# EAGLE board working (EAGLE 6.3), part 1 of 2
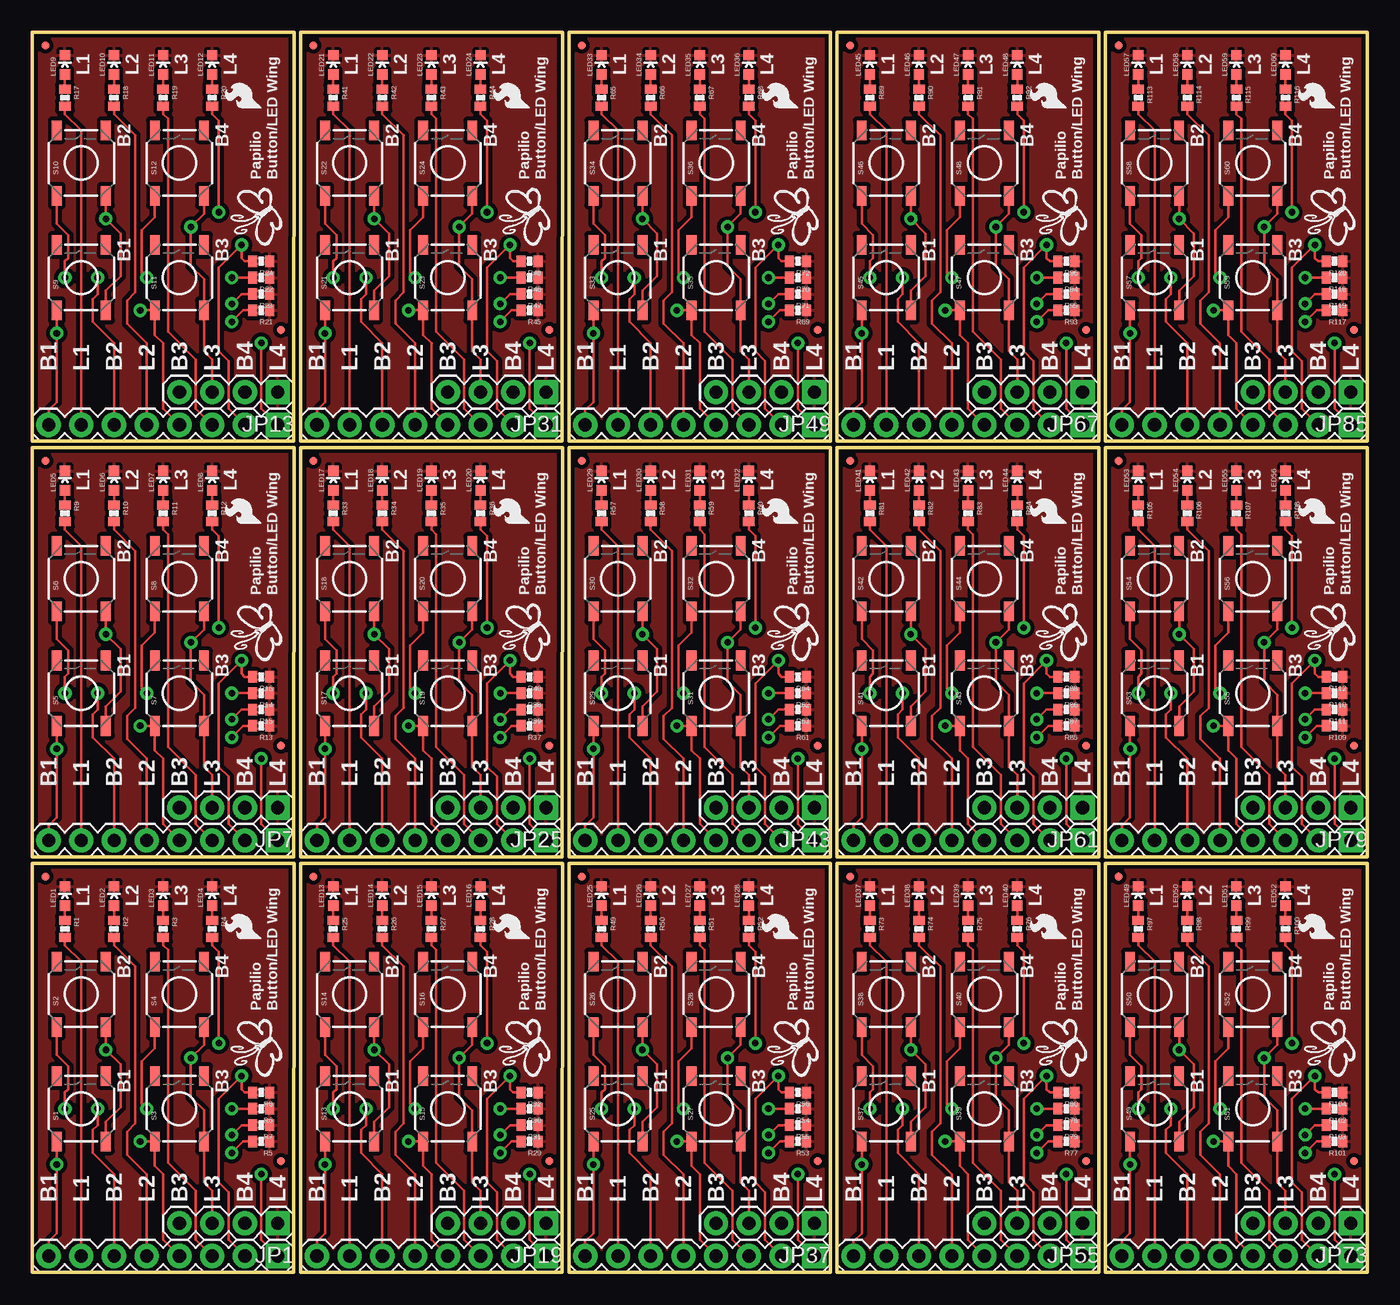
[diagram p0: board, top side]
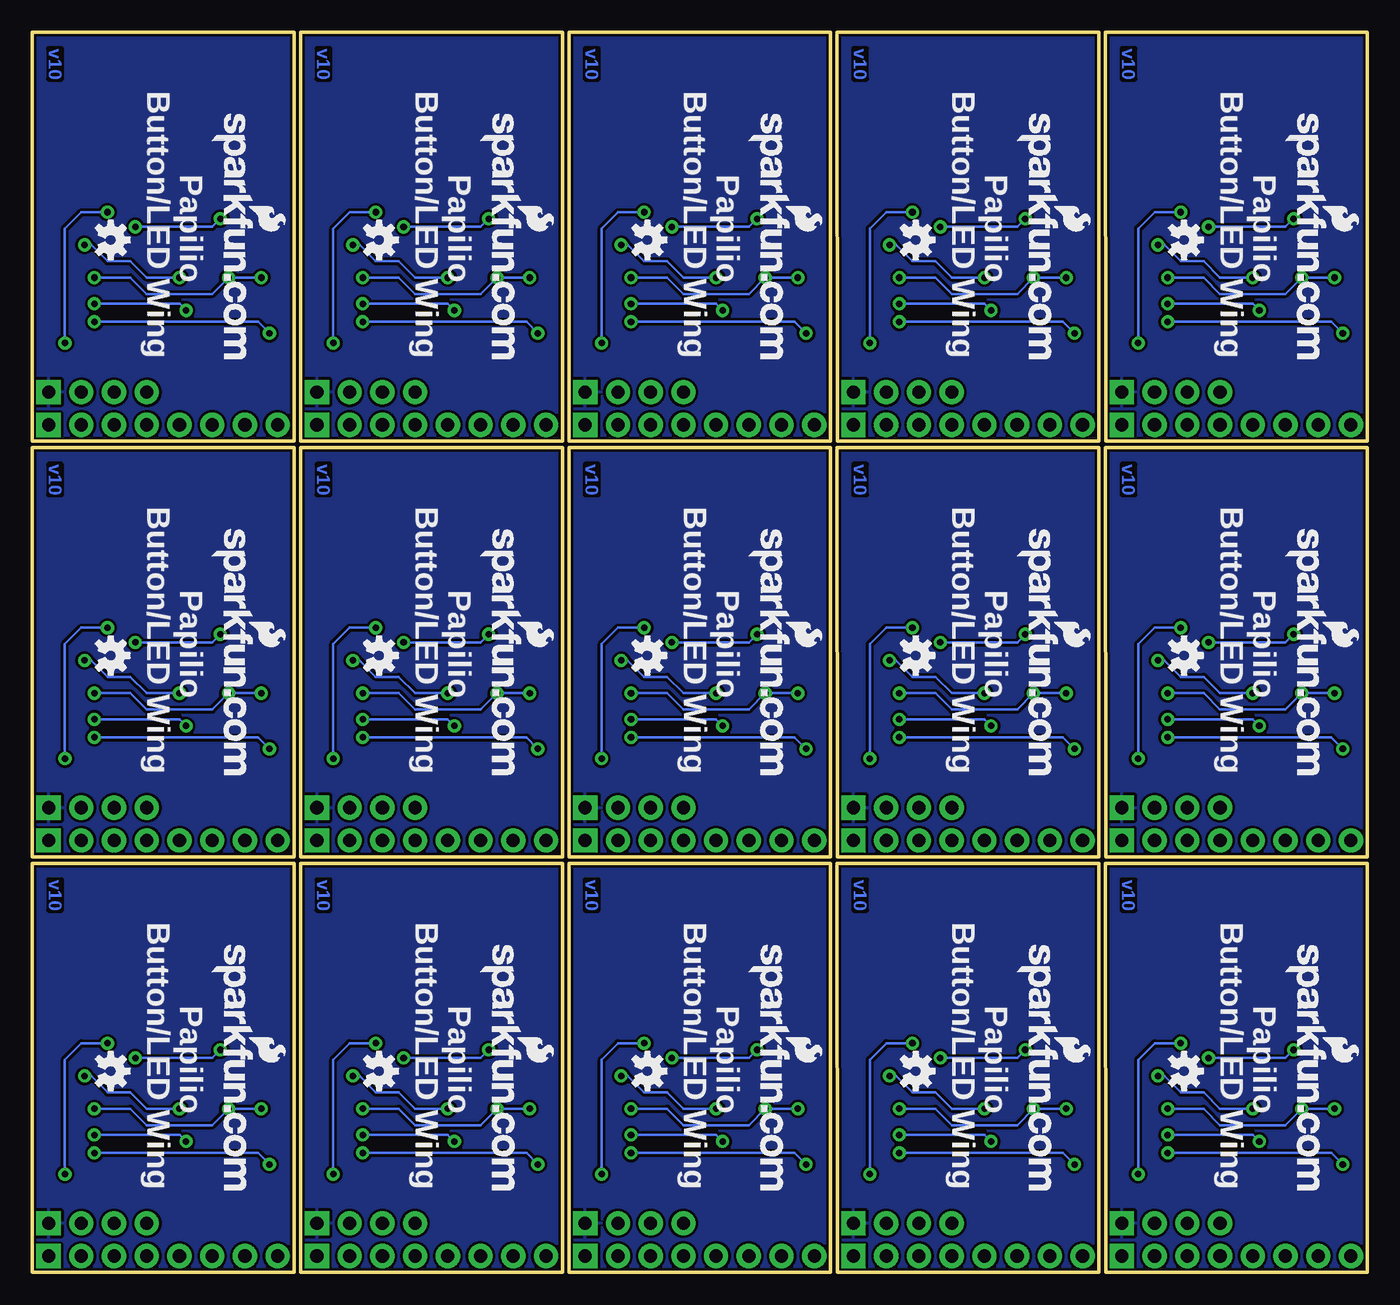
[diagram p1: board, bottom side, seen from below]

Size 103.63 x 96.27 mm. Coordinates in mm from the lower left corner, seen from the top.
Outline: 0,0 20.3,0 20.32,31.75 0,31.75 0,0
Outline: 0,32.26 20.3,32.26 20.32,64.01 0,64.01 0,32.26
Outline: 0,64.52 20.3,64.52 20.32,96.27 0,96.27 0,64.52
Outline: 20.83,0 41.13,0 41.15,31.75 20.83,31.75 20.83,0
Outline: 20.83,32.26 41.13,32.26 41.15,64.01 20.83,64.01 20.83,32.26
Outline: 20.83,64.52 41.13,64.52 41.15,96.27 20.83,96.27 20.83,64.52
Outline: 41.66,0 61.96,0 61.98,31.75 41.66,31.75 41.66,0
Outline: 41.66,32.26 61.96,32.26 61.98,64.01 41.66,64.01 41.66,32.26
Outline: 41.66,64.52 61.96,64.52 61.98,96.27 41.66,96.27 41.66,64.52
Outline: 62.48,0 82.78,0 82.8,31.75 62.48,31.75 62.48,0
Outline: 62.48,32.26 82.78,32.26 82.8,64.01 62.48,64.01 62.48,32.26
Outline: 62.48,64.52 82.78,64.52 82.8,96.27 62.48,96.27 62.48,64.52
Outline: 83.31,0 103.61,0 103.63,31.75 83.31,31.75 83.31,0
Outline: 83.31,32.26 103.61,32.26 103.63,64.01 83.31,64.01 83.31,32.26
Outline: 83.31,64.52 103.61,64.52 103.63,96.27 83.31,96.27 83.31,64.52
Copper layers (1*16): Top 0.035mm / dielectric 1.5mm / Bottom 0.035mm
Design rules "default": minimum track width 8mil, minimum drill 20mil, track to track 8mil, track to pad 8mil, pad to pad 8mil, via to via 8mil, smd to smd 8mil, copper to edge 8mil, drill to drill 8mil, minimum pad ring 12mil, minimum via ring 10mil, stop-mask expansion 4mil, vias tented up to drill 20mil, thermal gap 10mil

## Footprints (pad centres in the part's own frame; a part is rotated, then mirrored left to right if it is on the bottom)
1X04 = drill 1.016 pad 1.88 square: 1 0,0 | drill 1.016 pad 1.88: 2 2.54,0; 3 5.08,0; 4 7.62,0
1X08 = drill 1.016 pad 1.88 square: 1 0,0 | drill 1.016 pad 1.88: 2 2.54,0; 3 5.08,0; 4 7.62,0; 5 10.16,0; 6 12.7,0; 7 15.24,0; 8 17.78,0
MICRO-FIDUCIAL = smd 0.635 x 0.635: 1 0,0
LED-0603 = smd 0.8 x 0.8: A 0,-0.75; C 0,0.75
0402-RES = smd 0.7 x 0.9: 1 -0.65,0; 2 0.65,0
TACTILE_SWITCH_SMD = smd 1.524 x 0.762: 1 -2.54,1.905; 2 2.54,1.905; 3 -2.54,-1.905; 4 2.54,-1.905

## Placement (x,y rotation side)
JP1  [1X04]  19.05,3.81 180 top
JP2  [1X08]  19.05,1.27 180 top
JP3  LOGO-SFESK  [SFE-LOGO-FLAME]  17.78,25.91 90 top
JP4  LOGO-SFENEW  [SFE-NEW-WEBLOGO]  6.35,25.4 270 bottom
JP5  FIDUCIALUFIDUCIAL  [MICRO-FIDUCIAL]  1.02,30.73 0 top
JP6  FIDUCIALUFIDUCIAL  [MICRO-FIDUCIAL]  19.3,8.64 0 top
JP7  [1X04]  19.05,36.07 180 top
JP8  [1X08]  19.05,33.53 180 top
JP9  LOGO-SFESK  [SFE-LOGO-FLAME]  17.78,58.17 90 top
JP10  LOGO-SFENEW  [SFE-NEW-WEBLOGO]  6.35,57.66 270 bottom
JP11  FIDUCIALUFIDUCIAL  [MICRO-FIDUCIAL]  1.02,62.99 0 top
JP12  FIDUCIALUFIDUCIAL  [MICRO-FIDUCIAL]  19.3,40.89 0 top
JP13  [1X04]  19.05,68.33 180 top
JP14  [1X08]  19.05,65.79 180 top
JP15  LOGO-SFESK  [SFE-LOGO-FLAME]  17.78,90.42 90 top
JP16  LOGO-SFENEW  [SFE-NEW-WEBLOGO]  6.35,89.92 270 bottom
JP17  FIDUCIALUFIDUCIAL  [MICRO-FIDUCIAL]  1.02,95.25 0 top
JP18  FIDUCIALUFIDUCIAL  [MICRO-FIDUCIAL]  19.3,73.15 0 top
JP19  [1X04]  39.88,3.81 180 top
JP20  [1X08]  39.88,1.27 180 top
JP21  LOGO-SFESK  [SFE-LOGO-FLAME]  38.61,25.91 90 top
JP22  LOGO-SFENEW  [SFE-NEW-WEBLOGO]  27.18,25.4 270 bottom
JP23  FIDUCIALUFIDUCIAL  [MICRO-FIDUCIAL]  21.84,30.73 0 top
JP24  FIDUCIALUFIDUCIAL  [MICRO-FIDUCIAL]  40.13,8.64 0 top
JP25  [1X04]  39.88,36.07 180 top
JP26  [1X08]  39.88,33.53 180 top
JP27  LOGO-SFESK  [SFE-LOGO-FLAME]  38.61,58.17 90 top
JP28  LOGO-SFENEW  [SFE-NEW-WEBLOGO]  27.18,57.66 270 bottom
JP29  FIDUCIALUFIDUCIAL  [MICRO-FIDUCIAL]  21.84,62.99 0 top
JP30  FIDUCIALUFIDUCIAL  [MICRO-FIDUCIAL]  40.13,40.89 0 top
JP31  [1X04]  39.88,68.33 180 top
JP32  [1X08]  39.88,65.79 180 top
JP33  LOGO-SFESK  [SFE-LOGO-FLAME]  38.61,90.42 90 top
JP34  LOGO-SFENEW  [SFE-NEW-WEBLOGO]  27.18,89.92 270 bottom
JP35  FIDUCIALUFIDUCIAL  [MICRO-FIDUCIAL]  21.84,95.25 0 top
JP36  FIDUCIALUFIDUCIAL  [MICRO-FIDUCIAL]  40.13,73.15 0 top
JP37  [1X04]  60.71,3.81 180 top
JP38  [1X08]  60.71,1.27 180 top
JP39  LOGO-SFESK  [SFE-LOGO-FLAME]  59.44,25.91 90 top
JP40  LOGO-SFENEW  [SFE-NEW-WEBLOGO]  48.01,25.4 270 bottom
JP41  FIDUCIALUFIDUCIAL  [MICRO-FIDUCIAL]  42.67,30.73 0 top
JP42  FIDUCIALUFIDUCIAL  [MICRO-FIDUCIAL]  60.96,8.64 0 top
JP43  [1X04]  60.71,36.07 180 top
JP44  [1X08]  60.71,33.53 180 top
JP45  LOGO-SFESK  [SFE-LOGO-FLAME]  59.44,58.17 90 top
JP46  LOGO-SFENEW  [SFE-NEW-WEBLOGO]  48.01,57.66 270 bottom
JP47  FIDUCIALUFIDUCIAL  [MICRO-FIDUCIAL]  42.67,62.99 0 top
JP48  FIDUCIALUFIDUCIAL  [MICRO-FIDUCIAL]  60.96,40.89 0 top
JP49  [1X04]  60.71,68.33 180 top
JP50  [1X08]  60.71,65.79 180 top
JP51  LOGO-SFESK  [SFE-LOGO-FLAME]  59.44,90.42 90 top
JP52  LOGO-SFENEW  [SFE-NEW-WEBLOGO]  48.01,89.92 270 bottom
JP53  FIDUCIALUFIDUCIAL  [MICRO-FIDUCIAL]  42.67,95.25 0 top
JP54  FIDUCIALUFIDUCIAL  [MICRO-FIDUCIAL]  60.96,73.15 0 top
JP55  [1X04]  81.53,3.81 180 top
JP56  [1X08]  81.53,1.27 180 top
JP57  LOGO-SFESK  [SFE-LOGO-FLAME]  80.26,25.91 90 top
JP58  LOGO-SFENEW  [SFE-NEW-WEBLOGO]  68.83,25.4 270 bottom
JP59  FIDUCIALUFIDUCIAL  [MICRO-FIDUCIAL]  63.5,30.73 0 top
JP60  FIDUCIALUFIDUCIAL  [MICRO-FIDUCIAL]  81.79,8.64 0 top
JP61  [1X04]  81.53,36.07 180 top
JP62  [1X08]  81.53,33.53 180 top
JP63  LOGO-SFESK  [SFE-LOGO-FLAME]  80.26,58.17 90 top
JP64  LOGO-SFENEW  [SFE-NEW-WEBLOGO]  68.83,57.66 270 bottom
JP65  FIDUCIALUFIDUCIAL  [MICRO-FIDUCIAL]  63.5,62.99 0 top
JP66  FIDUCIALUFIDUCIAL  [MICRO-FIDUCIAL]  81.79,40.89 0 top
JP67  [1X04]  81.53,68.33 180 top
JP68  [1X08]  81.53,65.79 180 top
JP69  LOGO-SFESK  [SFE-LOGO-FLAME]  80.26,90.42 90 top
JP70  LOGO-SFENEW  [SFE-NEW-WEBLOGO]  68.83,89.92 270 bottom
JP71  FIDUCIALUFIDUCIAL  [MICRO-FIDUCIAL]  63.5,95.25 0 top
JP72  FIDUCIALUFIDUCIAL  [MICRO-FIDUCIAL]  81.79,73.15 0 top
JP73  [1X04]  102.36,3.81 180 top
JP74  [1X08]  102.36,1.27 180 top
JP75  LOGO-SFESK  [SFE-LOGO-FLAME]  101.09,25.91 90 top
JP76  LOGO-SFENEW  [SFE-NEW-WEBLOGO]  89.66,25.4 270 bottom
JP77  FIDUCIALUFIDUCIAL  [MICRO-FIDUCIAL]  84.33,30.73 0 top
JP78  FIDUCIALUFIDUCIAL  [MICRO-FIDUCIAL]  102.62,8.64 0 top
JP79  [1X04]  102.36,36.07 180 top
JP80  [1X08]  102.36,33.53 180 top
JP81  LOGO-SFESK  [SFE-LOGO-FLAME]  101.09,58.17 90 top
JP82  LOGO-SFENEW  [SFE-NEW-WEBLOGO]  89.66,57.66 270 bottom
JP83  FIDUCIALUFIDUCIAL  [MICRO-FIDUCIAL]  84.33,62.99 0 top
JP84  FIDUCIALUFIDUCIAL  [MICRO-FIDUCIAL]  102.62,40.89 0 top
JP85  [1X04]  102.36,68.33 180 top
JP86  [1X08]  102.36,65.79 180 top
JP87  LOGO-SFESK  [SFE-LOGO-FLAME]  101.09,90.42 90 top
JP88  LOGO-SFENEW  [SFE-NEW-WEBLOGO]  89.66,89.92 270 bottom
JP89  FIDUCIALUFIDUCIAL  [MICRO-FIDUCIAL]  84.33,95.25 0 top
JP90  FIDUCIALUFIDUCIAL  [MICRO-FIDUCIAL]  102.62,73.15 0 top
LED1  Red  [LED-0603]  2.54,29.21 0 top
LED2  Yellow  [LED-0603]  6.35,29.21 0 top
LED3  Green  [LED-0603]  10.16,29.21 0 top
LED4  Blue  [LED-0603]  13.97,29.21 0 top
LED5  Red  [LED-0603]  2.54,61.47 0 top
LED6  Yellow  [LED-0603]  6.35,61.47 0 top
LED7  Green  [LED-0603]  10.16,61.47 0 top
LED8  Blue  [LED-0603]  13.97,61.47 0 top
LED9  Red  [LED-0603]  2.54,93.73 0 top
LED10  Yellow  [LED-0603]  6.35,93.73 0 top
LED11  Green  [LED-0603]  10.16,93.73 0 top
LED12  Blue  [LED-0603]  13.97,93.73 0 top
LED13  Red  [LED-0603]  23.37,29.21 0 top
LED14  Yellow  [LED-0603]  27.18,29.21 0 top
LED15  Green  [LED-0603]  30.99,29.21 0 top
LED16  Blue  [LED-0603]  34.8,29.21 0 top
LED17  Red  [LED-0603]  23.37,61.47 0 top
LED18  Yellow  [LED-0603]  27.18,61.47 0 top
LED19  Green  [LED-0603]  30.99,61.47 0 top
LED20  Blue  [LED-0603]  34.8,61.47 0 top
LED21  Red  [LED-0603]  23.37,93.73 0 top
LED22  Yellow  [LED-0603]  27.18,93.73 0 top
LED23  Green  [LED-0603]  30.99,93.73 0 top
LED24  Blue  [LED-0603]  34.8,93.73 0 top
LED25  Red  [LED-0603]  44.2,29.21 0 top
LED26  Yellow  [LED-0603]  48.01,29.21 0 top
LED27  Green  [LED-0603]  51.82,29.21 0 top
LED28  Blue  [LED-0603]  55.63,29.21 0 top
LED29  Red  [LED-0603]  44.2,61.47 0 top
LED30  Yellow  [LED-0603]  48.01,61.47 0 top
LED31  Green  [LED-0603]  51.82,61.47 0 top
LED32  Blue  [LED-0603]  55.63,61.47 0 top
LED33  Red  [LED-0603]  44.2,93.73 0 top
LED34  Yellow  [LED-0603]  48.01,93.73 0 top
LED35  Green  [LED-0603]  51.82,93.73 0 top
LED36  Blue  [LED-0603]  55.63,93.73 0 top
LED37  Red  [LED-0603]  65.02,29.21 0 top
LED38  Yellow  [LED-0603]  68.83,29.21 0 top
LED39  Green  [LED-0603]  72.64,29.21 0 top
LED40  Blue  [LED-0603]  76.45,29.21 0 top
LED41  Red  [LED-0603]  65.02,61.47 0 top
LED42  Yellow  [LED-0603]  68.83,61.47 0 top
LED43  Green  [LED-0603]  72.64,61.47 0 top
LED44  Blue  [LED-0603]  76.45,61.47 0 top
LED45  Red  [LED-0603]  65.02,93.73 0 top
LED46  Yellow  [LED-0603]  68.83,93.73 0 top
LED47  Green  [LED-0603]  72.64,93.73 0 top
LED48  Blue  [LED-0603]  76.45,93.73 0 top
LED49  Red  [LED-0603]  85.85,29.21 0 top
LED50  Yellow  [LED-0603]  89.66,29.21 0 top
LED51  Green  [LED-0603]  93.47,29.21 0 top
LED52  Blue  [LED-0603]  97.28,29.21 0 top
LED53  Red  [LED-0603]  85.85,61.47 0 top
LED54  Yellow  [LED-0603]  89.66,61.47 0 top
LED55  Green  [LED-0603]  93.47,61.47 0 top
LED56  Blue  [LED-0603]  97.28,61.47 0 top
LED57  Red  [LED-0603]  85.85,93.73 0 top
LED58  Yellow  [LED-0603]  89.66,93.73 0 top
LED59  Green  [LED-0603]  93.47,93.73 0 top
LED60  Blue  [LED-0603]  97.28,93.73 0 top
R1  220  [0402-RES]  2.54,26.67 270 top
R2  220  [0402-RES]  6.35,26.67 270 top
R3  220  [0402-RES]  10.16,26.67 270 top
R4  220  [0402-RES]  13.97,26.67 270 top
R5  10k  [0402-RES]  17.78,10.16 180 top
R6  10k  [0402-RES]  17.78,12.7 180 top
R7  10k  [0402-RES]  17.78,11.43 180 top
R8  10k  [0402-RES]  17.78,13.97 180 top
R9  220  [0402-RES]  2.54,58.93 270 top
R10  220  [0402-RES]  6.35,58.93 270 top
R11  220  [0402-RES]  10.16,58.93 270 top
R12  220  [0402-RES]  13.97,58.93 270 top
R13  10k  [0402-RES]  17.78,42.42 180 top
R14  10k  [0402-RES]  17.78,44.96 180 top
R15  10k  [0402-RES]  17.78,43.69 180 top
R16  10k  [0402-RES]  17.78,46.23 180 top
R17  220  [0402-RES]  2.54,91.19 270 top
R18  220  [0402-RES]  6.35,91.19 270 top
R19  220  [0402-RES]  10.16,91.19 270 top
R20  220  [0402-RES]  13.97,91.19 270 top
R21  10k  [0402-RES]  17.78,74.68 180 top
R22  10k  [0402-RES]  17.78,77.22 180 top
R23  10k  [0402-RES]  17.78,75.95 180 top
R24  10k  [0402-RES]  17.78,78.49 180 top
R25  220  [0402-RES]  23.37,26.67 270 top
R26  220  [0402-RES]  27.18,26.67 270 top
R27  220  [0402-RES]  30.99,26.67 270 top
R28  220  [0402-RES]  34.8,26.67 270 top
R29  10k  [0402-RES]  38.61,10.16 180 top
R30  10k  [0402-RES]  38.61,12.7 180 top
R31  10k  [0402-RES]  38.61,11.43 180 top
R32  10k  [0402-RES]  38.61,13.97 180 top
R33  220  [0402-RES]  23.37,58.93 270 top
R34  220  [0402-RES]  27.18,58.93 270 top
R35  220  [0402-RES]  30.99,58.93 270 top
R36  220  [0402-RES]  34.8,58.93 270 top
R37  10k  [0402-RES]  38.61,42.42 180 top
R38  10k  [0402-RES]  38.61,44.96 180 top
R39  10k  [0402-RES]  38.61,43.69 180 top
R40  10k  [0402-RES]  38.61,46.23 180 top
R41  220  [0402-RES]  23.37,91.19 270 top
R42  220  [0402-RES]  27.18,91.19 270 top
R43  220  [0402-RES]  30.99,91.19 270 top
R44  220  [0402-RES]  34.8,91.19 270 top
R45  10k  [0402-RES]  38.61,74.68 180 top
R46  10k  [0402-RES]  38.61,77.22 180 top
R47  10k  [0402-RES]  38.61,75.95 180 top
R48  10k  [0402-RES]  38.61,78.49 180 top
R49  220  [0402-RES]  44.2,26.67 270 top
R50  220  [0402-RES]  48.01,26.67 270 top
R51  220  [0402-RES]  51.82,26.67 270 top
R52  220  [0402-RES]  55.63,26.67 270 top
R53  10k  [0402-RES]  59.44,10.16 180 top
R54  10k  [0402-RES]  59.44,12.7 180 top
R55  10k  [0402-RES]  59.44,11.43 180 top
R56  10k  [0402-RES]  59.44,13.97 180 top
R57  220  [0402-RES]  44.2,58.93 270 top
R58  220  [0402-RES]  48.01,58.93 270 top
R59  220  [0402-RES]  51.82,58.93 270 top
R60  220  [0402-RES]  55.63,58.93 270 top
R61  10k  [0402-RES]  59.44,42.42 180 top
R62  10k  [0402-RES]  59.44,44.96 180 top
R63  10k  [0402-RES]  59.44,43.69 180 top
R64  10k  [0402-RES]  59.44,46.23 180 top
R65  220  [0402-RES]  44.2,91.19 270 top
R66  220  [0402-RES]  48.01,91.19 270 top
R67  220  [0402-RES]  51.82,91.19 270 top
R68  220  [0402-RES]  55.63,91.19 270 top
R69  10k  [0402-RES]  59.44,74.68 180 top
R70  10k  [0402-RES]  59.44,77.22 180 top
R71  10k  [0402-RES]  59.44,75.95 180 top
R72  10k  [0402-RES]  59.44,78.49 180 top
R73  220  [0402-RES]  65.02,26.67 270 top
R74  220  [0402-RES]  68.83,26.67 270 top
R75  220  [0402-RES]  72.64,26.67 270 top
R76  220  [0402-RES]  76.45,26.67 270 top
R77  10k  [0402-RES]  80.26,10.16 180 top
R78  10k  [0402-RES]  80.26,12.7 180 top
R79  10k  [0402-RES]  80.26,11.43 180 top
R80  10k  [0402-RES]  80.26,13.97 180 top
R81  220  [0402-RES]  65.02,58.93 270 top
R82  220  [0402-RES]  68.83,58.93 270 top
R83  220  [0402-RES]  72.64,58.93 270 top
R84  220  [0402-RES]  76.45,58.93 270 top
R85  10k  [0402-RES]  80.26,42.42 180 top
R86  10k  [0402-RES]  80.26,44.96 180 top
R87  10k  [0402-RES]  80.26,43.69 180 top
R88  10k  [0402-RES]  80.26,46.23 180 top
R89  220  [0402-RES]  65.02,91.19 270 top
R90  220  [0402-RES]  68.83,91.19 270 top
R91  220  [0402-RES]  72.64,91.19 270 top
R92  220  [0402-RES]  76.45,91.19 270 top
R93  10k  [0402-RES]  80.26,74.68 180 top
R94  10k  [0402-RES]  80.26,77.22 180 top
R95  10k  [0402-RES]  80.26,75.95 180 top
R96  10k  [0402-RES]  80.26,78.49 180 top
R97  220  [0402-RES]  85.85,26.67 270 top
R98  220  [0402-RES]  89.66,26.67 270 top
R99  220  [0402-RES]  93.47,26.67 270 top
R100  220  [0402-RES]  97.28,26.67 270 top
R101  10k  [0402-RES]  101.09,10.16 180 top
R102  10k  [0402-RES]  101.09,12.7 180 top
R103  10k  [0402-RES]  101.09,11.43 180 top
R104  10k  [0402-RES]  101.09,13.97 180 top
R105  220  [0402-RES]  85.85,58.93 270 top
R106  220  [0402-RES]  89.66,58.93 270 top
R107  220  [0402-RES]  93.47,58.93 270 top
R108  220  [0402-RES]  97.28,58.93 270 top
R109  10k  [0402-RES]  101.09,42.42 180 top
R110  10k  [0402-RES]  101.09,44.96 180 top
R111  10k  [0402-RES]  101.09,43.69 180 top
R112  10k  [0402-RES]  101.09,46.23 180 top
R113  220  [0402-RES]  85.85,91.19 270 top
R114  220  [0402-RES]  89.66,91.19 270 top
R115  220  [0402-RES]  93.47,91.19 270 top
R116  220  [0402-RES]  97.28,91.19 270 top
R117  10k  [0402-RES]  101.09,74.68 180 top
R118  10k  [0402-RES]  101.09,77.22 180 top
R119  10k  [0402-RES]  101.09,75.95 180 top
R120  10k  [0402-RES]  101.09,78.49 180 top
S1  Button 1  [TACTILE_SWITCH_SMD]  3.81,12.7 90 top
S2  Button 2  [TACTILE_SWITCH_SMD]  3.81,21.59 90 top
S3  Button 3  [TACTILE_SWITCH_SMD]  11.43,12.7 90 top
S4  Button 4  [TACTILE_SWITCH_SMD]  11.43,21.59 90 top
S5  Button 1  [TACTILE_SWITCH_SMD]  3.81,44.96 90 top
S6  Button 2  [TACTILE_SWITCH_SMD]  3.81,53.85 90 top
S7  Button 3  [TACTILE_SWITCH_SMD]  11.43,44.96 90 top
S8  Button 4  [TACTILE_SWITCH_SMD]  11.43,53.85 90 top
S9  Button 1  [TACTILE_SWITCH_SMD]  3.81,77.22 90 top
S10  Button 2  [TACTILE_SWITCH_SMD]  3.81,86.11 90 top
S11  Button 3  [TACTILE_SWITCH_SMD]  11.43,77.22 90 top
S12  Button 4  [TACTILE_SWITCH_SMD]  11.43,86.11 90 top
S13  Button 1  [TACTILE_SWITCH_SMD]  24.64,12.7 90 top
S14  Button 2  [TACTILE_SWITCH_SMD]  24.64,21.59 90 top
S15  Button 3  [TACTILE_SWITCH_SMD]  32.26,12.7 90 top
S16  Button 4  [TACTILE_SWITCH_SMD]  32.26,21.59 90 top
S17  Button 1  [TACTILE_SWITCH_SMD]  24.64,44.96 90 top
S18  Button 2  [TACTILE_SWITCH_SMD]  24.64,53.85 90 top
S19  Button 3  [TACTILE_SWITCH_SMD]  32.26,44.96 90 top
S20  Button 4  [TACTILE_SWITCH_SMD]  32.26,53.85 90 top
S21  Button 1  [TACTILE_SWITCH_SMD]  24.64,77.22 90 top
S22  Button 2  [TACTILE_SWITCH_SMD]  24.64,86.11 90 top
S23  Button 3  [TACTILE_SWITCH_SMD]  32.26,77.22 90 top
S24  Button 4  [TACTILE_SWITCH_SMD]  32.26,86.11 90 top
S25  Button 1  [TACTILE_SWITCH_SMD]  45.47,12.7 90 top
S26  Button 2  [TACTILE_SWITCH_SMD]  45.47,21.59 90 top
S27  Button 3  [TACTILE_SWITCH_SMD]  53.09,12.7 90 top
S28  Button 4  [TACTILE_SWITCH_SMD]  53.09,21.59 90 top
S29  Button 1  [TACTILE_SWITCH_SMD]  45.47,44.96 90 top
S30  Button 2  [TACTILE_SWITCH_SMD]  45.47,53.85 90 top
S31  Button 3  [TACTILE_SWITCH_SMD]  53.09,44.96 90 top
S32  Button 4  [TACTILE_SWITCH_SMD]  53.09,53.85 90 top
S33  Button 1  [TACTILE_SWITCH_SMD]  45.47,77.22 90 top
S34  Button 2  [TACTILE_SWITCH_SMD]  45.47,86.11 90 top
S35  Button 3  [TACTILE_SWITCH_SMD]  53.09,77.22 90 top
S36  Button 4  [TACTILE_SWITCH_SMD]  53.09,86.11 90 top
S37  Button 1  [TACTILE_SWITCH_SMD]  66.29,12.7 90 top
S38  Button 2  [TACTILE_SWITCH_SMD]  66.29,21.59 90 top
S39  Button 3  [TACTILE_SWITCH_SMD]  73.91,12.7 90 top
S40  Button 4  [TACTILE_SWITCH_SMD]  73.91,21.59 90 top
S41  Button 1  [TACTILE_SWITCH_SMD]  66.29,44.96 90 top
S42  Button 2  [TACTILE_SWITCH_SMD]  66.29,53.85 90 top
S43  Button 3  [TACTILE_SWITCH_SMD]  73.91,44.96 90 top
S44  Button 4  [TACTILE_SWITCH_SMD]  73.91,53.85 90 top
S45  Button 1  [TACTILE_SWITCH_SMD]  66.29,77.22 90 top
S46  Button 2  [TACTILE_SWITCH_SMD]  66.29,86.11 90 top
S47  Button 3  [TACTILE_SWITCH_SMD]  73.91,77.22 90 top
S48  Button 4  [TACTILE_SWITCH_SMD]  73.91,86.11 90 top
S49  Button 1  [TACTILE_SWITCH_SMD]  87.12,12.7 90 top
S50  Button 2  [TACTILE_SWITCH_SMD]  87.12,21.59 90 top
S51  Button 3  [TACTILE_SWITCH_SMD]  94.74,12.7 90 top
S52  Button 4  [TACTILE_SWITCH_SMD]  94.74,21.59 90 top
S53  Button 1  [TACTILE_SWITCH_SMD]  87.12,44.96 90 top
S54  Button 2  [TACTILE_SWITCH_SMD]  87.12,53.85 90 top
S55  Button 3  [TACTILE_SWITCH_SMD]  94.74,44.96 90 top
S56  Button 4  [TACTILE_SWITCH_SMD]  94.74,53.85 90 top
S57  Button 1  [TACTILE_SWITCH_SMD]  87.12,77.22 90 top
S58  Button 2  [TACTILE_SWITCH_SMD]  87.12,86.11 90 top
S59  Button 3  [TACTILE_SWITCH_SMD]  94.74,77.22 90 top
S60  Button 4  [TACTILE_SWITCH_SMD]  94.74,86.11 90 top
U$1  OSHW-LOGOS  [OSHW-LOGO-S]  14.22,15.62 270 bottom
U$2  OSHW-LOGOS  [OSHW-LOGO-S]  14.22,47.88 270 bottom
U$3  OSHW-LOGOS  [OSHW-LOGO-S]  14.22,80.14 270 bottom
U$4  OSHW-LOGOS  [OSHW-LOGO-S]  35.05,15.62 270 bottom
U$5  OSHW-LOGOS  [OSHW-LOGO-S]  35.05,47.88 270 bottom
U$6  OSHW-LOGOS  [OSHW-LOGO-S]  35.05,80.14 270 bottom
U$7  OSHW-LOGOS  [OSHW-LOGO-S]  55.88,15.62 270 bottom
U$8  OSHW-LOGOS  [OSHW-LOGO-S]  55.88,47.88 270 bottom
U$9  OSHW-LOGOS  [OSHW-LOGO-S]  55.88,80.14 270 bottom
U$10  OSHW-LOGOS  [OSHW-LOGO-S]  76.71,15.62 270 bottom
U$11  OSHW-LOGOS  [OSHW-LOGO-S]  76.71,47.88 270 bottom
U$12  OSHW-LOGOS  [OSHW-LOGO-S]  76.71,80.14 270 bottom
U$13  OSHW-LOGOS  [OSHW-LOGO-S]  97.54,15.62 270 bottom
U$14  OSHW-LOGOS  [OSHW-LOGO-S]  97.54,47.88 270 bottom
U$15  OSHW-LOGOS  [OSHW-LOGO-S]  97.54,80.14 270 bottom

## Library data of the parts
JP1 JP2 JP7 JP8 JP13 JP14 JP19 JP20 JP25 JP26 JP31 JP32 JP37 JP38 JP43 JP44 JP49 JP50 JP55 JP56 JP61 JP62 JP67 JP68 JP73 JP74 JP79 JP80 JP85 JP86 = SparkFun-Connectors
JP3 JP4 JP9 JP10 JP15 JP16 JP21 JP22 JP27 JP28 JP33 JP34 JP39 JP40 JP45 JP46 JP51 JP52 JP57 JP58 JP63 JP64 JP69 JP70 JP75 JP76 JP81 JP82 JP87 JP88 U$1-U$15 = SparkFun-Aesthetics
JP5 JP6 JP11 JP12 JP17 JP18 JP23 JP24 JP29 JP30 JP35 JP36 JP41 JP42 JP47 JP48 JP53 JP54 JP59 JP60 JP65 JP66 JP71 JP72 JP77 JP78 JP83 JP84 JP89 JP90 = SparkFun
LED1-LED60 = SparkFun-LED
R1-R120 = SparkFun-Passives
S1-S60 = SparkFun-Electromechanical

## Nets
3.3V: JP1.3 S1.3 S2.3 S3.3 S4.3
3.3V1: JP7.3 S5.3 S6.3 S7.3 S8.3
3.3V2: JP13.3 S9.3 S10.3 S11.3 S12.3
3.3V3: JP19.3 S13.3 S14.3 S15.3 S16.3
3.3V4: JP25.3 S17.3 S18.3 S19.3 S20.3
3.3V5: JP31.3 S21.3 S22.3 S23.3 S24.3
3.3V6: JP37.3 S25.3 S26.3 S27.3 S28.3
3.3V7: JP43.3 S29.3 S30.3 S31.3 S32.3
3.3V8: JP49.3 S33.3 S34.3 S35.3 S36.3
3.3V9: JP55.3 S37.3 S38.3 S39.3 S40.3
3.3V10: JP61.3 S41.3 S42.3 S43.3 S44.3
3.3V11: JP67.3 S45.3 S46.3 S47.3 S48.3
3.3V12: JP73.3 S49.3 S50.3 S51.3 S52.3
3.3V13: JP79.3 S53.3 S54.3 S55.3 S56.3
3.3V14: JP85.3 S57.3 S58.3 S59.3 S60.3
GND: JP1.1 LED1.C LED2.C LED3.C LED4.C R5.1 R6.1 R7.1 R8.1
GND1: JP7.1 LED5.C LED6.C LED7.C LED8.C R13.1 R14.1 R15.1 R16.1
GND2: JP13.1 LED9.C LED10.C LED11.C LED12.C R21.1 R22.1 R23.1 R24.1
GND3: JP19.1 LED13.C LED14.C LED15.C LED16.C R29.1 R30.1 R31.1 R32.1
GND4: JP25.1 LED17.C LED18.C LED19.C LED20.C R37.1 R38.1 R39.1 R40.1
GND5: JP31.1 LED21.C LED22.C LED23.C LED24.C R45.1 R46.1 R47.1 R48.1
GND6: JP37.1 LED25.C LED26.C LED27.C LED28.C R53.1 R54.1 R55.1 R56.1
GND7: JP43.1 LED29.C LED30.C LED31.C LED32.C R61.1 R62.1 R63.1 R64.1
GND8: JP49.1 LED33.C LED34.C LED35.C LED36.C R69.1 R70.1 R71.1 R72.1
GND9: JP55.1 LED37.C LED38.C LED39.C LED40.C R77.1 R78.1 R79.1 R80.1
GND10: JP61.1 LED41.C LED42.C LED43.C LED44.C R85.1 R86.1 R87.1 R88.1
GND11: JP67.1 LED45.C LED46.C LED47.C LED48.C R93.1 R94.1 R95.1 R96.1
GND12: JP73.1 LED49.C LED50.C LED51.C LED52.C R101.1 R102.1 R103.1 R104.1
GND13: JP79.1 LED53.C LED54.C LED55.C LED56.C R109.1 R110.1 R111.1 R112.1
GND14: JP85.1 LED57.C LED58.C LED59.C LED60.C R117.1 R118.1 R119.1 R120.1
LED1: JP2.7 R1.2
LED2: JP2.5 R2.2
LED3: JP2.3 R3.2
LED4: JP2.1 R4.2
LED5: JP8.7 R9.2
LED6: JP8.5 R10.2
LED7: JP8.3 R11.2
LED8: JP8.1 R12.2
LED9: JP14.7 R17.2
LED10: JP14.5 R18.2
LED11: JP14.3 R19.2
LED12: JP14.1 R20.2
LED13: JP20.7 R25.2
LED14: JP20.5 R26.2
LED15: JP20.3 R27.2
LED16: JP20.1 R28.2
LED17: JP26.7 R33.2
LED18: JP26.5 R34.2
LED19: JP26.3 R35.2
LED20: JP26.1 R36.2
LED21: JP32.7 R41.2
LED22: JP32.5 R42.2
LED23: JP32.3 R43.2
LED24: JP32.1 R44.2
LED25: JP38.7 R49.2
LED26: JP38.5 R50.2
LED27: JP38.3 R51.2
LED28: JP38.1 R52.2
LED29: JP44.7 R57.2
LED30: JP44.5 R58.2
LED31: JP44.3 R59.2
LED32: JP44.1 R60.2
LED33: JP50.7 R65.2
LED34: JP50.5 R66.2
LED35: JP50.3 R67.2
LED36: JP50.1 R68.2
LED37: JP56.7 R73.2
LED38: JP56.5 R74.2
LED39: JP56.3 R75.2
LED40: JP56.1 R76.2
LED41: JP62.7 R81.2
LED42: JP62.5 R82.2
LED43: JP62.3 R83.2
LED44: JP62.1 R84.2
LED45: JP68.7 R89.2
LED46: JP68.5 R90.2
LED47: JP68.3 R91.2
LED48: JP68.1 R92.2
LED49: JP74.7 R97.2
LED50: JP74.5 R98.2
LED51: JP74.3 R99.2
LED52: JP74.1 R100.2
LED53: JP80.7 R105.2
LED54: JP80.5 R106.2
LED55: JP80.3 R107.2
LED56: JP80.1 R108.2
LED57: JP86.7 R113.2
LED58: JP86.5 R114.2
LED59: JP86.3 R115.2
LED60: JP86.1 R116.2
N$1: LED1.A R1.1
N$2: LED5.A R9.1
N$3: LED7.A R11.1
N$4: LED3.A R3.1
N$5: LED2.A R2.1
N$6: LED4.A R4.1
N$7: LED6.A R10.1
N$8: LED8.A R12.1
N$9: LED9.A R17.1
N$10: LED11.A R19.1
N$11: LED10.A R18.1
N$12: LED12.A R20.1
N$13: LED13.A R25.1
N$14: LED15.A R27.1
N$15: LED14.A R26.1
N$16: LED16.A R28.1
N$17: LED17.A R33.1
N$18: LED19.A R35.1
N$19: LED18.A R34.1
N$20: LED20.A R36.1
N$21: LED21.A R41.1
N$22: LED23.A R43.1
N$23: LED22.A R42.1
N$24: LED24.A R44.1
N$25: LED25.A R49.1
N$26: LED27.A R51.1
N$27: LED26.A R50.1
N$28: LED28.A R52.1
N$29: LED29.A R57.1
N$30: LED31.A R59.1
N$31: LED30.A R58.1
N$32: LED32.A R60.1
N$33: LED33.A R65.1
N$34: LED35.A R67.1
N$35: LED34.A R66.1
N$36: LED36.A R68.1
N$37: LED37.A R73.1
N$38: LED39.A R75.1
N$39: LED38.A R74.1
N$40: LED40.A R76.1
N$41: LED41.A R81.1
N$42: LED43.A R83.1
N$43: LED42.A R82.1
N$44: LED44.A R84.1
N$45: LED45.A R89.1
N$46: LED47.A R91.1
N$47: LED46.A R90.1
N$48: LED48.A R92.1
N$49: LED49.A R97.1
N$50: LED51.A R99.1
N$51: LED50.A R98.1
N$52: LED52.A R100.1
N$53: LED53.A R105.1
N$54: LED55.A R107.1
N$55: LED54.A R106.1
N$56: LED56.A R108.1
N$57: LED57.A R113.1
N$58: LED59.A R115.1
N$59: LED58.A R114.1
N$60: LED60.A R116.1
PB1: JP2.8 R5.2 S1.1
PB2: JP2.6 R6.2 S2.1
PB3: JP2.4 R7.2 S3.1
PB4: JP2.2 R8.2 S4.1
PB5: JP8.8 R13.2 S5.1
PB6: JP8.6 R14.2 S6.1
PB7: JP8.4 R15.2 S7.1
PB8: JP8.2 R16.2 S8.1
PB9: JP14.8 R21.2 S9.1
PB10: JP14.6 R22.2 S10.1
PB11: JP14.4 R23.2 S11.1
PB12: JP14.2 R24.2 S12.1
PB13: JP20.8 R29.2 S13.1
PB14: JP20.6 R30.2 S14.1
PB15: JP20.4 R31.2 S15.1
PB16: JP20.2 R32.2 S16.1
PB17: JP26.8 R37.2 S17.1
PB18: JP26.6 R38.2 S18.1
PB19: JP26.4 R39.2 S19.1
PB20: JP26.2 R40.2 S20.1
PB21: JP32.8 R45.2 S21.1
PB22: JP32.6 R46.2 S22.1
PB23: JP32.4 R47.2 S23.1
PB24: JP32.2 R48.2 S24.1
PB25: JP38.8 R53.2 S25.1
PB26: JP38.6 R54.2 S26.1
PB27: JP38.4 R55.2 S27.1
PB28: JP38.2 R56.2 S28.1
PB29: JP44.8 R61.2 S29.1
PB30: JP44.6 R62.2 S30.1
PB31: JP44.4 R63.2 S31.1
PB32: JP44.2 R64.2 S32.1
PB33: JP50.8 R69.2 S33.1
PB34: JP50.6 R70.2 S34.1
PB35: JP50.4 R71.2 S35.1
PB36: JP50.2 R72.2 S36.1
PB37: JP56.8 R77.2 S37.1
PB38: JP56.6 R78.2 S38.1
PB39: JP56.4 R79.2 S39.1
PB40: JP56.2 R80.2 S40.1
PB41: JP62.8 R85.2 S41.1
PB42: JP62.6 R86.2 S42.1
PB43: JP62.4 R87.2 S43.1
PB44: JP62.2 R88.2 S44.1
PB45: JP68.8 R93.2 S45.1
PB46: JP68.6 R94.2 S46.1
PB47: JP68.4 R95.2 S47.1
PB48: JP68.2 R96.2 S48.1
PB49: JP74.8 R101.2 S49.1
PB50: JP74.6 R102.2 S50.1
PB51: JP74.4 R103.2 S51.1
PB52: JP74.2 R104.2 S52.1
PB53: JP80.8 R109.2 S53.1
PB54: JP80.6 R110.2 S54.1
PB55: JP80.4 R111.2 S55.1
PB56: JP80.2 R112.2 S56.1
PB57: JP86.8 R117.2 S57.1
PB58: JP86.6 R118.2 S58.1
PB59: JP86.4 R119.2 S59.1
PB60: JP86.2 R120.2 S60.1